# Altium PCB buck4.PcbDoc
Units mm, origin at the board's own origin, x right, y up, seen from the top; angles counter-clockwise.
Board outline 35 x 22 mm, 2 copper layers (Top Layer, Bottom Layer), stack 1.636 mm thick; 24 components, 18 nets, 87 pads, 73 vias.
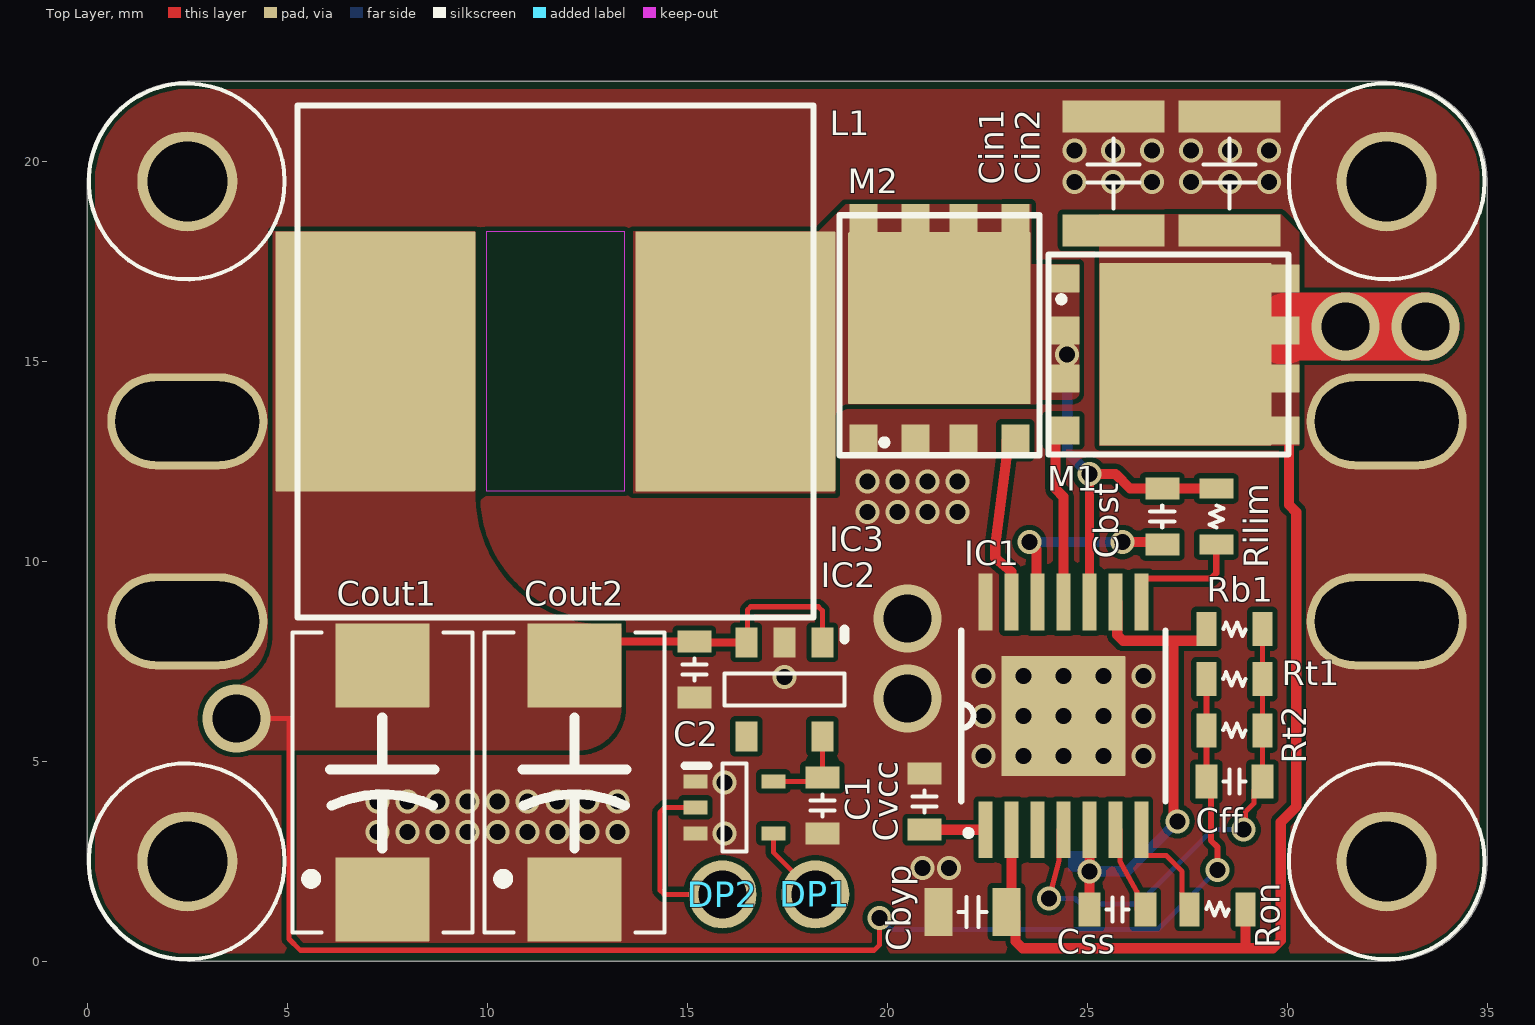
[diagram p0: Top Layer view]
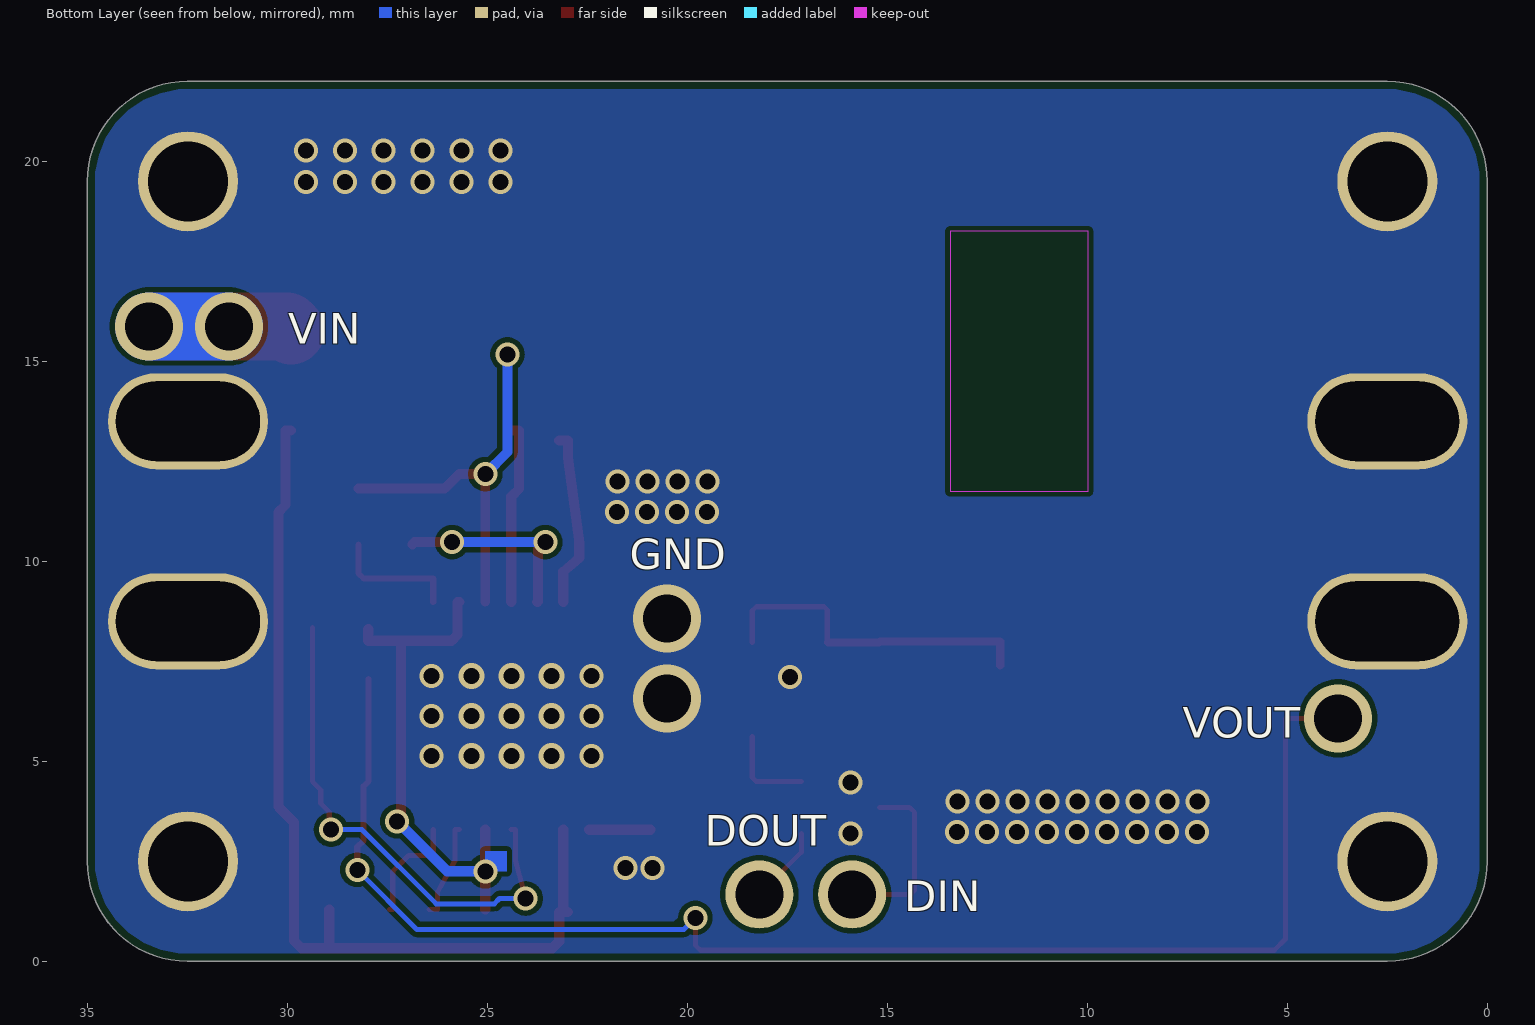
[diagram p1: Bottom Layer view, seen from below]
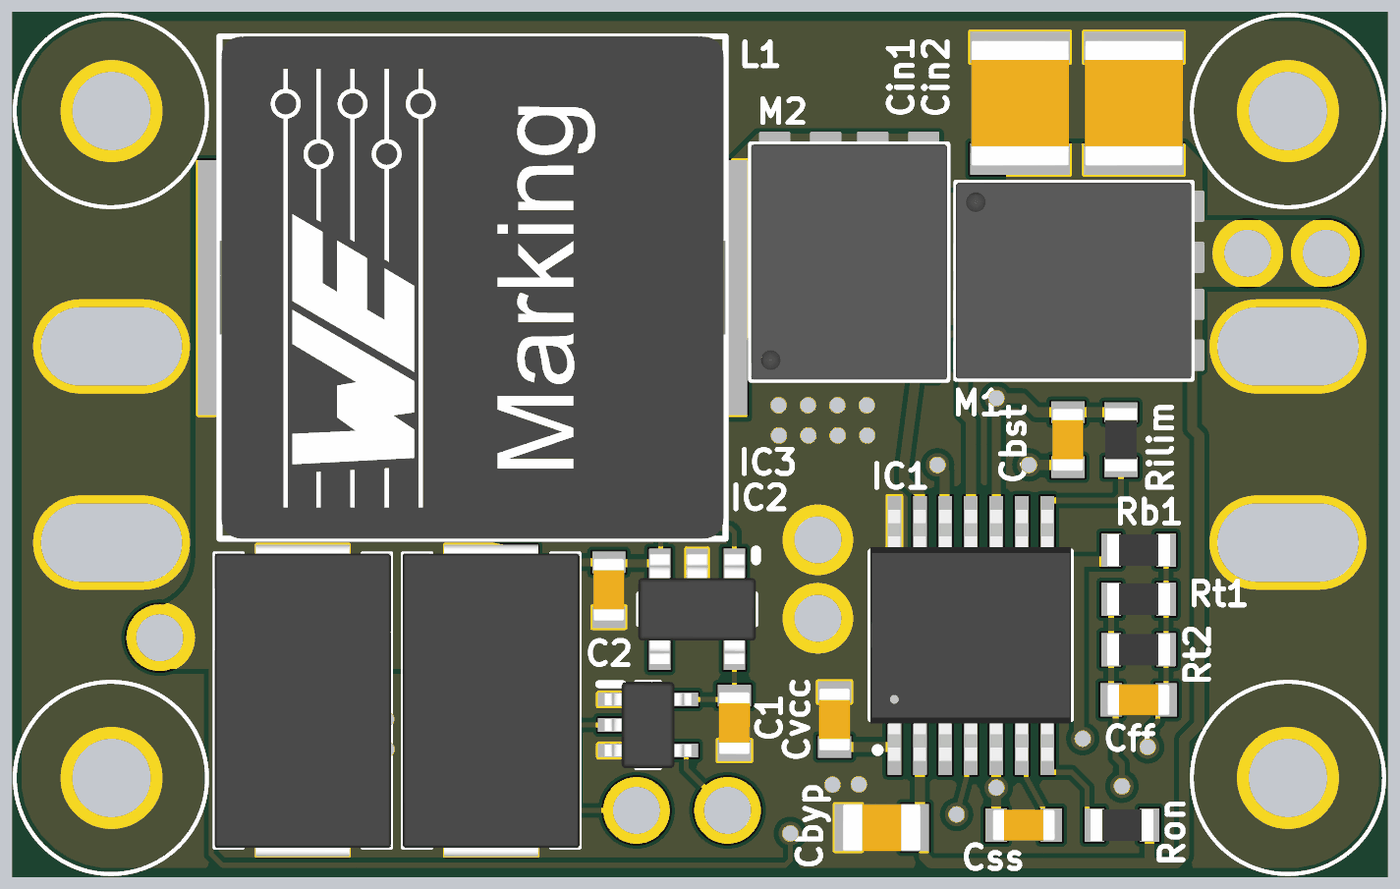
[diagram p2: 3D render of the assembled board from above, using the file's embedded part models]

## Layer stack, top to bottom
Top Solder: solder mask 0.025, Solder Resist, Dk 3.5
Top Layer: signal copper 0.043
Dielectric: prepreg 1.55, FR-4, Dk 4.8
Bottom Layer: signal copper 0.043
Bottom Solder: solder mask 0.025, Solder Resist, Dk 3.5

## Board outline
2.5,0 cw(c2.5,2.5) 0,2.5 0,19.5 cw(c2.5,19.5) 2.5,22 32.504,22 32.5,22 cw(c32.5,19.5) 35,19.5 35,2.5 cw(c32.5,2.5) 32.5,0

## Design rules (kind name [scope] priority, off if disabled: settings)
BoardOutlineClearance [Not (OnLayer('Top Overlay') Or OnLayer('Bottom Overlay'))] p1: gap=0.2 ignorepadtopadclearanceinfootprint=FALSE
Clearance [All] p1: gap=0.127 ignorepadtopadclearanceinfootprint=FALSE
ComponentClearance [All] p1: gap=0.05 collisioncheckmode=3 verticalgap=2540 showdistances=FALSE
HoleSize [All] p1: absolutevalues=TRUE maxlimit=4 minlimit=0.025 maxpercent=80.000 minpercent=20.000
MinimumSolderMaskSliver [All] p1: minsoldermaskwidth=0.2
PlaneConnect [All] p1: planeconnectstyle=Direct reliefexpansion=0.508 reliefentries=4 reliefconductorwidth=0.254 reliefairgap=0.254
PolygonConnect [All] p1: connectstyle=Direct reliefconductorwidth=0.254 reliefentries=4 polygonreliefangle="90 Angle" airgapwidth=0.254
RoutingVias [All] p1: holewidth=0.711 width=1.27 viastyle="Through Hole" minholewidth=0.711 minwidth=1.27 maxholewidth=1.27 maxwidth=2.032 useviatemplates=TRUE viatemplateguid#1={F0F41B76-7145-4EB6-9A2C-2BF1EEB807E4} viatemplateguid#2={B37A0867-A997-44BE-AD7F-C24633A05F15} viatemplateguid#3={6AB0E684-F162-4E90-9A63-0FB0FEC348A3} viatemplateguid#4={66FBC709-AF7E-4789-933E-082953A05DA2} viatemplatename#1=connector viatemplatename#2=gnd_stitch viatemplatename#3=signal_routing viatemplatename#4=v65h40m0mx0
ShortCircuit ShortCircuit_SGND [InNet('GND') vs InNet('SGND')] p1: allowed=TRUE
ShortCircuit [All] p2: allowed=FALSE
SolderMaskExpansion SolderMaskExpansion_STITCH [(PadViaLibraryTemplate='gnd_stitch') Or (PadViaLibraryTemplate='signal_routing')] p1: expansion=0.102 istentingtop=TRUE
SolderMaskExpansion [All] p2: expansion=0.05 istentingtop=FALSE
Width [All] p1: maxlimit=2.54 minlimit=0.127 preferedwidth=0.127
25 further rules are at their usual default settings.

## Components (designator, comment, footprint, x,y, rotation, side; value= is the part's Value field where it differs from the comment)
C1 "MLCC" CAPC1608X08L 18.376,3.898 r90 top value=1uF
C2 "MLCC" CAPC1608X08L 15.176,7.299 r90 top value=1uF
Cbst "MLCC" CAPC1608X08L 26.874,11.12 r90 top value=470nF
Cbyp "MLCC" CAPC2012X12L 22.13,1.235 r0 top value=100nF
Cff "MLCC" CAPC1608X08L 28.675,4.493 r180 top value=100pF
Cin1 "MLCC" CAPC3225X25L 25.656,19.7 r270 top value=47uF
Cin2 "MLCC" CAPC3225X25L 28.557,19.7 r270 top value=47uF
Cout1 "CAPACITOR" CAPMP7343X11L 7.375,4.475 r90 top value=47uF
Cout2 "CAPACITOR" CAPMP7343X11L 12.175,4.475 r90 top value=47uF
Css "MLCC" CAPC1608X08L 25.751,1.3 r0 top value=68nF
Cvcc "MLCC" CAPC1608X08L 20.927,3.991 r90 top value=2.2uF
DP1 "DATA_PAD" DATA_PAD 18.2,1.673 r0 top
DP2 "DATA_PAD" DATA_PAD 15.88,1.673 r0 top
IC1 "LM3150MH/NOPB" MXA14A 24.401,6.135 r90 top
IC2 "M74VHC1GT125" SOT65P210X100-5L 16.175,3.848 r0 top
IC3 "NCP551" SOT95P260X90-5L 17.426,6.799 r270 top
L1 "744313330" WE-HCI_1335 11.7,15 r90 top value=6.8uH
M1 "STL90N6F7" TRANS_NEXFET_Q5A 27.154,15.175 r0 top
M2 "STL90N6F7" TRANS_NEXFET_Q5A 21.301,15.777 r90 top
Rb1 "RES0603" RESC1608X03L 28.675,8.311 r0 top value=10K
Rilim "RES0603" RESC1608X03L 28.224,11.12 r90 top value=2.21K (schematic designator RiLim)
Ron "RES0603" RESC1608X03L 28.251,1.3 r180 top value=240k
Rt1 "RES0603" RESC1608X03L 28.675,7.053 r180 top value=91k
Rt2 "RES0603" RESC1608X03L 28.675,5.772 r180 top value=3M

## Footprints (in the part's own frame and the unit in brackets; to place one, negate y for a bottom-side part, rotate by r counter-clockwise, add the part's x,y. Pads: shape width x height; smd on the part's side, far side on the other; paste and mask are expansions set on the pad)
CAPC1608X08L [mm] "Chip Capacitor, 2-Leads, Body 1.60x0.80mm, IPC High Density"
  rrect1% 0.55x0.85 smd: 1(-0.7,0) 2(0.7,0)
  silkscreen extent -0.28,-0.3 0.28,0.3, body extent -0.8,-0.4 0.8,0.4, height 0.8
CAPC2012X12L [mm] "Chip Capacitor, 2-Leads, Body 2.00x1.20mm, IPC High Density"
  rrect1% 0.7x1.2 smd: 1(-0.85,0) 2(0.85,0)
  silkscreen extent -0.35,-0.38 0.35,0.38, body extent -1,-0.6 1,0.6, height 1.2
CAPC3225X25L [mm] "Chip Capacitor, 2-Leads, Body 3.20x2.50mm, IPC High Density"
  rrect1% 0.8x2.55 smd: 1(-1.425,0) 2(1.425,0)
  silkscreen extent -0.87,-0.65 0.87,0.65, body extent -1.6,-1.25 1.6,1.25, height 2.5
CAPMP7343X11L [mm] "Molded Capacitor, 2-Leads, Body 7.30x4.30mm, IPC High Density"
  rrect1% 2.1x2.35 smd: 1(2.925,0) 2(-2.925,0)
  silkscreen extent -3.75,-2.25 3.75,2.25, body extent -3.97,-2.25 3.97,2.25, height 1.1
DATA_PAD [mm]
  round 1.7 hole 1.2: 1(0,0)
MXA14A [mil]
  rrect1% 56x13.78 smd mask+1.97: 1(-112,76.77) 2(-112,51.18) 3(-112,25.59) 4(-112,0) 5(-112,-25.59) 6(-112,-51.18) 7(-112,-76.77) 8(112,-76.77) 9(112,-51.18) 10(112,-25.59) 11(112,0) 12(112,25.59) 13(112,51.18) 14(112,76.77)
  rrect1% 118x122 smd mask+1.97: 15(0,0)
  silkscreen extent -118,-100 84,100, body extent -126,-100 126,101, height 43
RESC1608X03L [mm] "Chip Resistor, 2-Leads, Body 1.60x0.80mm, IPC High Density"
  rrect1% 0.5x0.85 smd: 1(-0.7,0) 2(0.7,0)
  silkscreen extent -0.27,-0.18 0.28,0.17, body extent -0.8,-0.4 0.8,0.4, height 0.3
SOT65P210X100-5L [mm] "SOT23, 5-Leads, Body 2.00x2.10mm, Pitch 0.65mm, IPC High Density"
  rrect1% 0.6x0.35 smd: 1(-0.975,0.65) 2(-0.975,0) 3(-0.975,-0.65) 4(0.975,-0.65) 5(0.975,0.65)
  silkscreen extent -1.24,-1.1 0.3,1.1, body extent -1.1,-1.1 1.1,1.1, height 1
SOT95P260X90-5L [mm] "SOT23, 5-Leads, Body 3.00x2.60mm, Pitch 0.95mm, IPC High Density"
  rrect1% 0.75x0.55 smd: 1(-1.175,0.95) 2(-1.175,0) 3(-1.175,-0.95) 4(1.175,-0.95) 5(1.175,0.95)
  silkscreen extent -1.5,-1.5 0.4,1.5, body extent -1.4,-1.5 1.4,1.5, height 0.9
TRANS_NEXFET_Q5A [mm]
  rrect1% 4.3x4.56 smd paste+0.05 mask+0.05: D(0.3,0)
  rrect1% 0.8x0.7 smd paste+0.05 mask+0.05: D(2.752,-1.9) D(2.752,-0.6) D(2.752,0.6) D(2.752,1.9) G(-2.752,-1.9) S(-2.752,-0.6) S(-2.752,0.6) S(-2.752,1.9)
  silkscreen extent -3.13,-2.5 2.88,2.5, body extent -3.13,-2.5 2.87,2.5, height 1.05
WE-HCI_1335 [mm]
  rrect1% 6.5x5 smd paste+0 mask+0.051: 1(0,4.5) 2(0,-4.5)
  silkscreen extent -6.4,-6.45 6.4,6.45, body extent -6.4,-6.45 6.4,6.45, height 3.4

## Part data
C1 C2 Cvcc: "Multilayer Ceramic Capacitor", Voltage=16V
Cbst Cbyp Css: "Multilayer Ceramic Capacitor", Voltage=25V
Cff: "Multilayer Ceramic Capacitor", Voltage=6.3V
Cin1 Cin2: "Multilayer Ceramic Capacitor", MPN=C3216X5R1E476M160AC, Voltage=25V, Vendor=TDK
Cout1 Cout2: "Electrolytic Capacitor", MPN=EEFCS1A470R, Voltage=6.3V, TYPE=Polymer, Vendor=Pansonic
IC1: "Buck controller", Manufacturer_Part_Number=LM3150MH/NOPB, MPN=LM3150MH/NOPB, RefDes=RefDes, TYPE=TYPE, Vendor="Texas Instruments"
IC2: "Level shifter non inverting"
L1: "Inductor", Manufacturer_Part_Number=744313330, MPN=744313330, RefDes=RefDes, TYPE=TYPE, Vendor="Wurth Elektronik"
M1: library part CSD17579Q5A, "N Channel MOSFET", Datasheet_URL=http://www.ti.com/lit/ds/symlink/CSD17579Q5A.pdf, IdsMax=14.0A, Manufacturer_Part_Number=CSD17579Q5A, MPN=CSD17579Q5A, QgTyp=5.4nC, Quantity=1, Rdsonat10V=0.0084Ohm, RefDes=RefDes, TYPE=TYPE, VdsMax=30.0V, Vendor="Texas Instruments"
M2: library part CSD18537NQ5A, "N Channel MOSFET", Datasheet_URL=http://www.ti.com/lit/ds/symlink/csd18537nq5a.pdf, IdsMax=50.0, Manufacturer_Part_Number=CSD18537NQ5A, MPN=CSD18537NQ5A, QgTyp=14.0, Quantity=1, Rdson45=0.014559, RefDes=RefDes, TYPE=TYPE, VdsMax=60.0, Vendor="Texas Instruments"
Rb1 Rilim Ron Rt1 Rt2: "Chip Resistor"

## Free pads (board coordinates)
  round 2.5 hole 2: 1(2.5,2.5) 1(2.5,19.5) 1(32.484,2.5) 1(32.484,19.5)
  oval 4x2.4 hole 2 slot 3.6 at 0 deg mask+0: 1(2.5,8.5) 1(2.5,13.5) 1(32.484,8.5) 1(32.484,13.5)

## Via types
v1: diameter 0.6, hole 0.4, Top Layer to Bottom Layer, tented both sides, 59 vias
v2: diameter 0.65, hole 0.4, Top Layer to Bottom Layer, tented both sides, 9 vias
v3: diameter 1.7, hole 1.2, Top Layer to Bottom Layer, 5 vias

## Nets (pads, with @x,y where several pads share a name; then routed paths per layer and width w, separated by ;. In a path a pad name is that pad's centre, name@x,y a point inside that pad or via, vN(x,y) a via of type N, cw(c..) or ccw(c..) an arc to the next point about the centre after c; other vN are vias at no path point)
BST: Cbst.1 IC1.12 | length 4.9
  Top Layer w0.254: v1(23.551,10.481) 23.731,10.301 23.731,9 IC1.12 ; v1(25.88,10.481) 26.813,10.481 Cbst.1
  Bottom Layer w0.254: v1(23.551,10.481) v1(25.88,10.481)
DATA: DP2.1 IC2.2 | length 4.5
  Top Layer w0.127: IC2.2 14.442,3.848 14.317,3.724 14.317,1.778 14.421,1.674 DP2.1
DATA_OUT: DP1.1 IC2.4 | length 2
  Top Layer w0.127: IC2.4 17.15,2.725 DP1.1
FB: Cff.1 IC1.4 Rb1.2 Rt1.1 Rt2.1 | length 12.8
  Top Layer w0.127: v1(24.04,1.57) 24.291,2.511 24.291,3.291 IC1.4 ; v1(28.908,3.291) 28.951,3.335 28.951,3.732 29.164,3.944 29.164,4.282 Cff.1 Rt2.1 Rt1.1 Rb1.2 Rb1.2@29.375,8.35
  Bottom Layer w0.127: v1(24.04,1.57) 24.693,1.57 24.825,1.438 26.28,1.438 28.132,3.291 v1(28.908,3.291)
GND: C1.1 C2.1 Cbyp.1 Cin1.1 Cin2.1 Cout1.2 Cout2.2 Cvcc.2 IC1.14 IC1.15 IC2.1 IC2.3 IC3.2 M2.S pad.1
  other v1: 20.874,2.327 21.546,2.337 15.926,3.2 7.26,3.229 8.01,3.229 8.76,3.229 9.51,3.229 10.26,3.229 11.01,3.229 11.76,3.229 12.51,3.229 13.26,3.229 7.25,4 8,4 8.75,4 9.5,4 10.25,4 11,4 11.75,4 12.5,4 13.25,4 15.926,4.47 22.401,5.135 26.401,5.135 22.401,6.135 26.401,6.135 17.436,7.105 22.401,7.135 26.401,7.135 19.51,11.229 20.26,11.229 21.01,11.229 21.76,11.229 19.5,12 20.25,12 21,12 21.75,12 24.675,19.478 25.647,19.478 26.619,19.478 27.592,19.478 28.564,19.478 29.536,19.478 24.675,20.265 25.647,20.265 26.619,20.265 27.592,20.265 28.564,20.265 29.536,20.265
  other v2: 23.401,5.135 24.401,5.135 25.401,5.135 23.401,6.135 24.401,6.135 25.401,6.135 23.401,7.135 24.401,7.135 25.401,7.135
  other v3: 20.503,6.57 20.503,8.57
HG: IC1.11 M1.G | length 4.6
  Top Layer w0.254: IC1.11 24.401,11.615 24.208,11.809 24.208,13.275 M1.G
ILIM: IC1.8 Rilim.1 | length 3.2
  Top Layer w0.152: IC1.8 26.351,9.574 28.095,9.574 28.224,9.703 Rilim.1
LG: IC1.13 M2.G | length 4.5
  Top Layer w0.254: IC1.13 23.101,9.74 22.7,10.087 22.7,10.453 22.979,12.582 22.979,13.025 M2.G
NetIC1_3: IC1.3
NetIC3_4: IC3.4
RON: IC1.7 Ron.2 | length 2.9
  Top Layer w0.127: IC1.7 26.351,2.643 26.972,2.643 27.365,2.25 27.365,1.3 Ron.2@27.45,1.3
SGND: Css.1 IC1.5 IC1.9 Rb1.1 | length 12.7
  Top Layer w0.254: Css.1 v1(25.051,2.252) IC1.5 ; IC1.9 25.749,8.98 25.749,8.158 25.892,8.015 27.158,8.015 ; v1(27.253,3.502) 27.158,3.597 27.158,8.015 ; Rb1.1 27.975,8.015 27.158,8.015
  Bottom Layer w0.254: v1(25.051,2.252) 26.003,2.252 v1(27.253,3.502)
SS: Css.2 IC1.6 | length 2.4
  Top Layer w0.127: IC1.6 25.813,3.291 25.813,2.509 26.24,1.739 26.24,1.3 Css.2
SW: Cbst.2 IC1.10 L1.2 M1.S M2.D Rilim.2 | length 9.7
  Top Layer w0.229: IC1.10 v1(25.051,12.181)
  Top Layer w0.254: v1(25.051,12.181) 25.707,12.181 26.067,11.82 Cbst.2 Rilim.2
  Bottom Layer w0.254: v1(24.497,15.172) 24.497,12.735 v1(25.051,12.181)
VCC: Cvcc.1 IC1.1 | length 1.5
  Top Layer w0.254: Cvcc.1 IC1.1
VCC5: C1.2 IC2.5 IC3.5 | length 2.3
  Top Layer w0.127: IC2.5 18.276,4.498 C1.2 IC3.5
VIN: Cbyp.2 Cin1.2 Cin2.2 IC1.2 M1.D Ron.1 | length 29.5
  Top Layer w0.254: Cbyp.2 Cbyp.2@23.101,1.235 ; IC1.2 Cbyp.2@23.101,1.235 ; Ron.1 28.951,0.327 ; M1.D@29.906,13.275 30.045,13.275 30.045,11.407 30.223,11.229 30.223,3.868 29.835,3.48 29.835,0.519 29.643,0.327 28.951,0.327 ; Cbyp.2@23.101,1.235 23.203,1.235 23.203,0.502 23.378,0.327 28.951,0.327
  Top Layer w1.7: M1.D@29.906,15.775 30.006,15.875 v3(31.461,15.875) v3(33.461,15.875)
  Bottom Layer w1.7: v3(31.461,15.875) v3(33.461,15.875)
VOUT: C2.2 Cff.2 Cout1.1 Cout2.1 IC3.1 IC3.3 L1.1 Rt1.2 Rt2.2 | length 45.3
  Top Layer w0.127: v3@3.378,6.075 v3(3.728,6.075) 5.043,6.075 5.043,0.558 5.324,0.276 19.672,0.276 19.8,0.404 v1(19.8,1.086) ; IC3.3 16.501,7.999 16.501,8.781 16.584,8.865 18.275,8.865 18.376,8.764 IC3.1
  Top Layer w0.152: Rt1.2 Rt2.2 Cff.2 28.092,4.376 28.092,3.019 28.251,2.86 v1(28.251,2.289)
  Top Layer w0.203: Cout2.1 12.175,7.999 C2.2 15.201,7.974 IC3.3
  Bottom Layer w0.127: v1(19.8,1.086) 20.088,0.798 26.761,0.798 v1(28.251,2.289)

## Polygon pours and split planes (outlines as drawn)
SW on Top Layer "SW_L01_P011" (solid, pour order 11): 23.593,17.425 24.801,17.425 24.801,14.225 cw(c24.613,14.225) 24.612,14.036 23.821,14.036 23.712,13.928 19.021,13.927 ccw(c19.021,13.607) 18.7,13.606 18.7,11.699 13.652,11.699 13.652,18.255 18.28,18.255 18.955,18.93 23.593,18.93
VIN on Top Layer "VIN_L01_P009" (solid, pour order 9): 25.304,18.675 25.304,12.895 30.304,12.895 30.304,18.224 29.852,18.675
VOUT on Top Layer "VOUT_L01_P010" (solid, pour order 10): 9.7,18.25 9.7,11.643 ccw(c12.92,11.643) 13.35,8.451 13.35,6.339 cw(c12.285,6.339) 12.285,5.275 3.728,5.275 cw(c3.728,6.076) 3.728,6.878 ccw(c3.309,8.135) 4.634,8.135 4.634,18.25
GND on Top Layer "TOP_GND" (solid, pour order 12): 0,0 0,21.996 35,21.996 35,0
GND on Bottom Layer "BOTTOM_GND" (solid, pour order 14): 0,0 0,21.996 35,21.996 35,0

## Keep-outs
Top Layer:
  region: 13.425,18.25 13.425,11.75 9.982,11.75 9.982,18.25
Bottom Layer:
  region: 13.425,18.25 13.425,11.75 9.982,11.75 9.982,18.25

## Other copper
Bottom Layer:
  region net SGND: 25.051,2.252 25.051,2.746 24.518,2.746 24.518,2.252

## Silkscreen, mask and mechanical layers (free items; w line width, h text height)
Top Overlay:
  circle w0.102: c2.484,2.5 r2.449
  circle w0.102: c2.484,19.5 r2.449
  circle w0.102: c32.484,2.5 r2.449
  circle w0.102: c32.484,19.5 r2.449
Bottom Overlay:
  text "VIN" at 29.972,15.443 h0.76
  text "GND" at 21.438,9.804 h0.76
  text "VOUT" at 7.62,5.588 h0.76
  text "DOUT" at 19.566,2.894 h0.76
  text "DIN" at 14.574,1.253 h0.76
Bottom Solder:
  pour cut-out: 14.021,17.932 14.021,17.17 22.987,17.17 22.987,18.009
Mechanical 1:
  lines w0.025: 32.5,22 cw(c32.5,19.5) 35,19.5 35,2.5 cw(c32.5,2.5) 32.5,0 2.5,0 cw(c2.5,2.5) 0,2.5 0,19.5 cw(c2.5,19.5) 2.5,22 32.504,22

## Dimensions
32.504,22 to 32.5,0 on Mechanical 16
0,19.5 to 35,2.5 on Mechanical 16